# Altium PCB key.PcbDoc
Units mm, origin at the board's own origin, x right, y up, seen from the top; angles counter-clockwise.
Board outline 15.13 x 40.13 mm, 2 copper layers (Top Layer, Bottom Layer); 14 components, 10 nets, 38 pads, 15 vias.
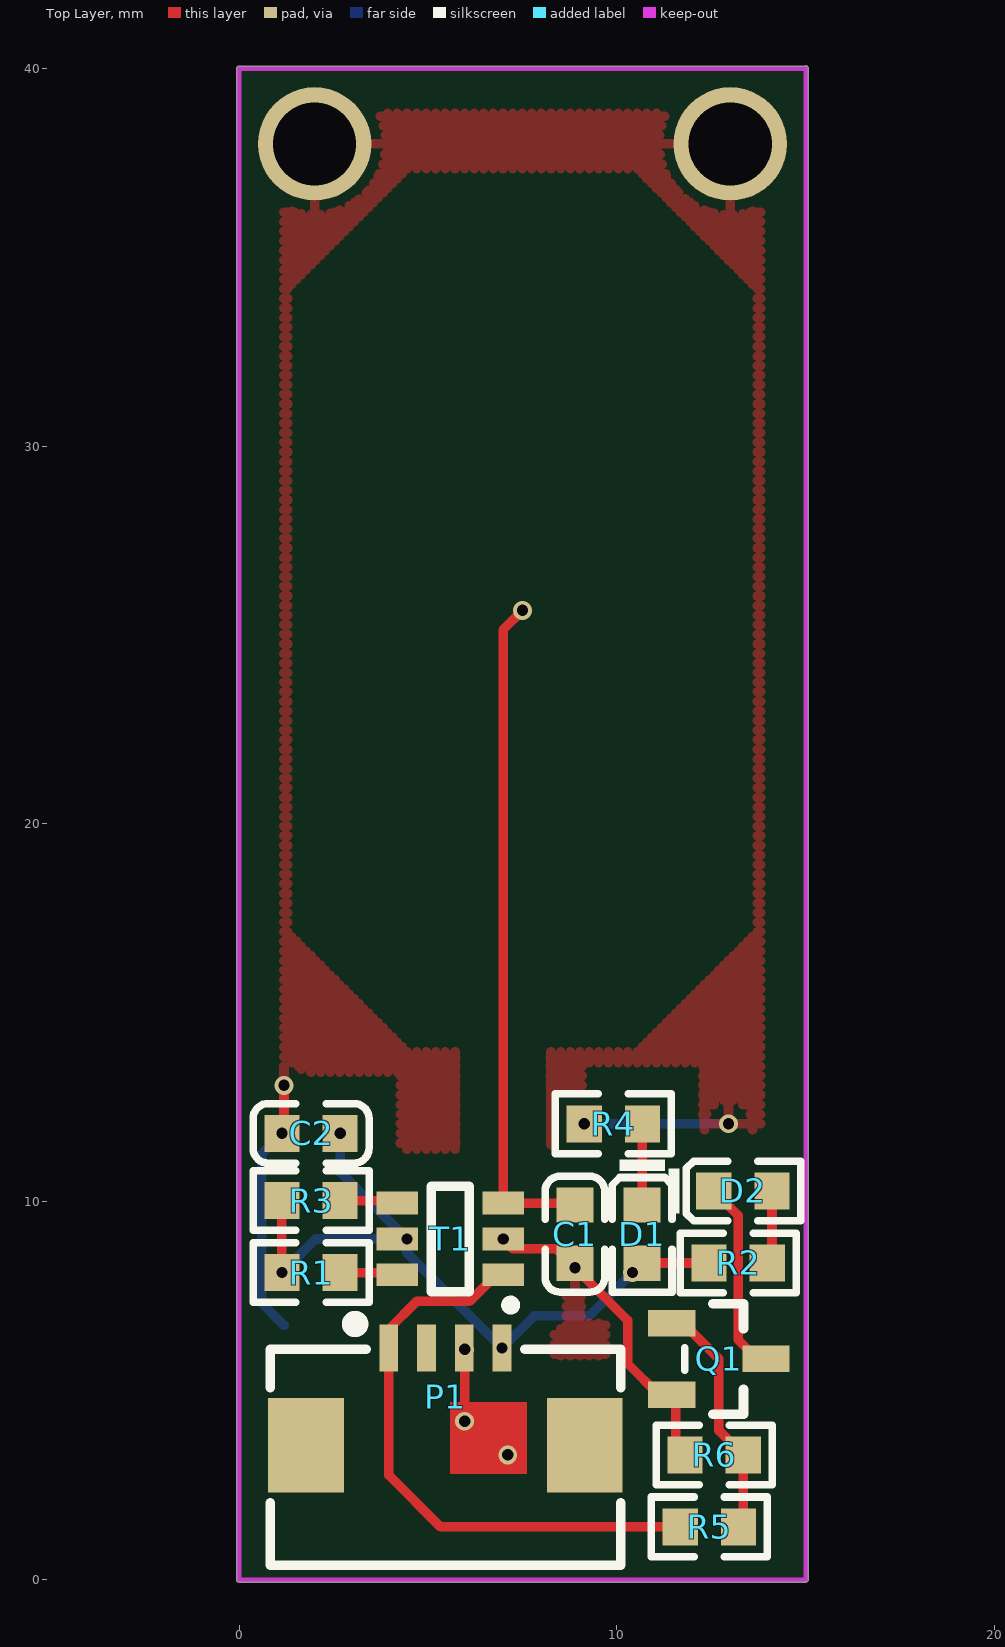
[diagram p0: Top Layer view]
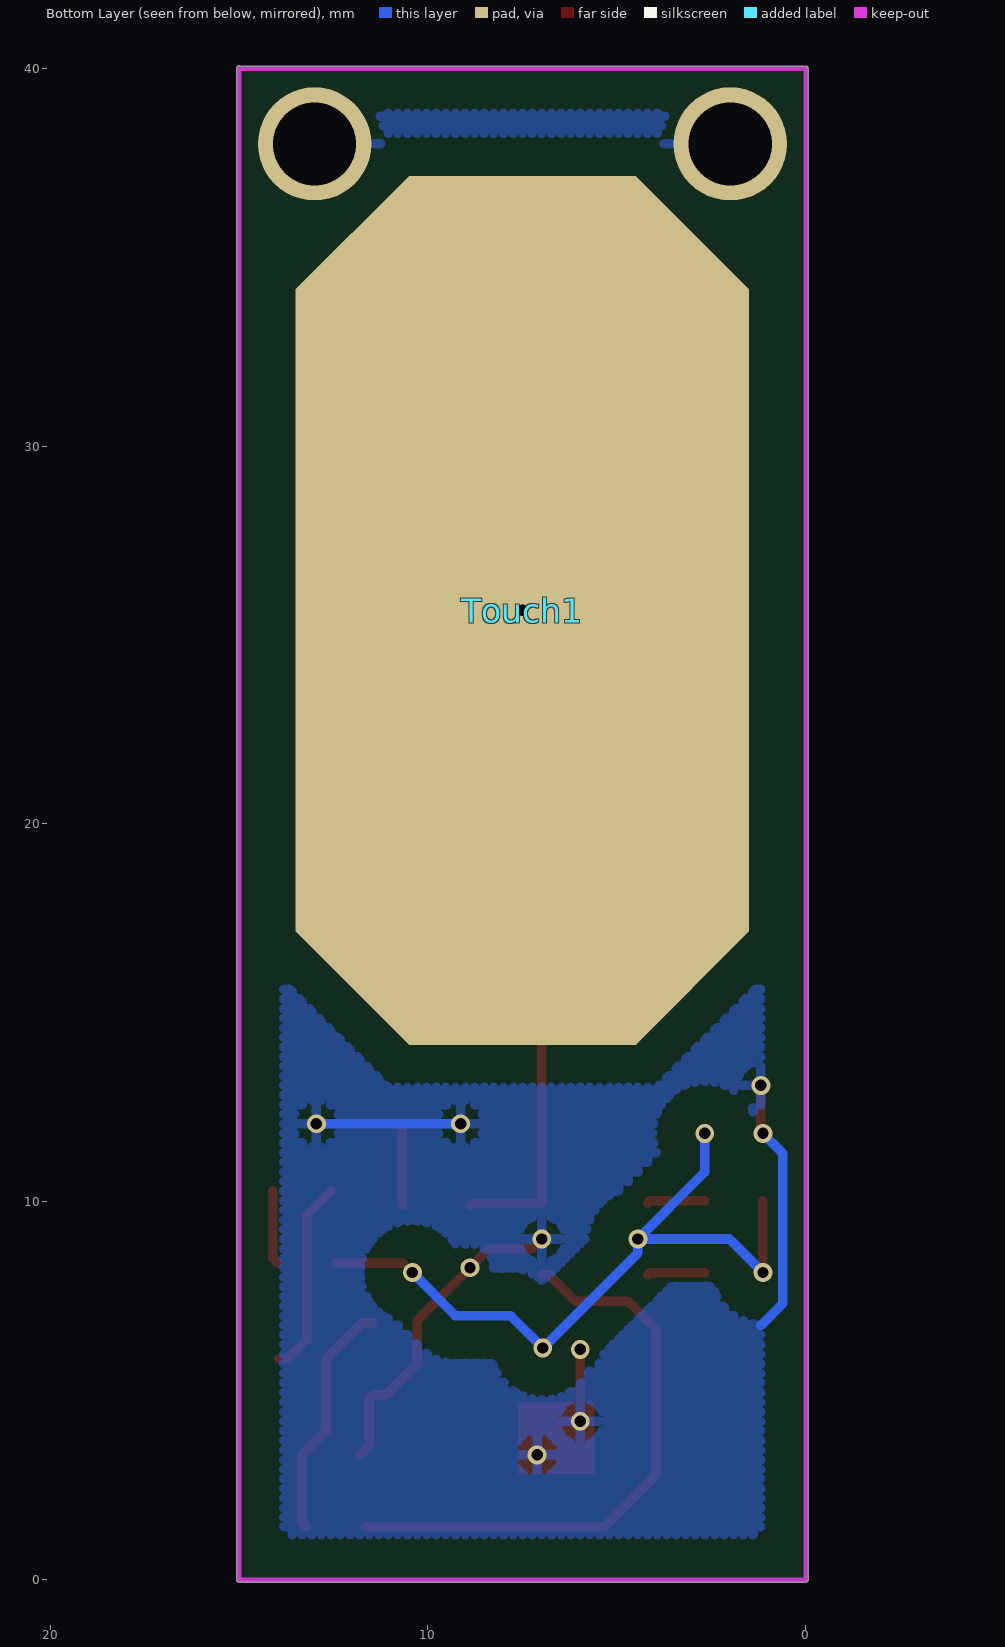
[diagram p1: Bottom Layer view, seen from below]
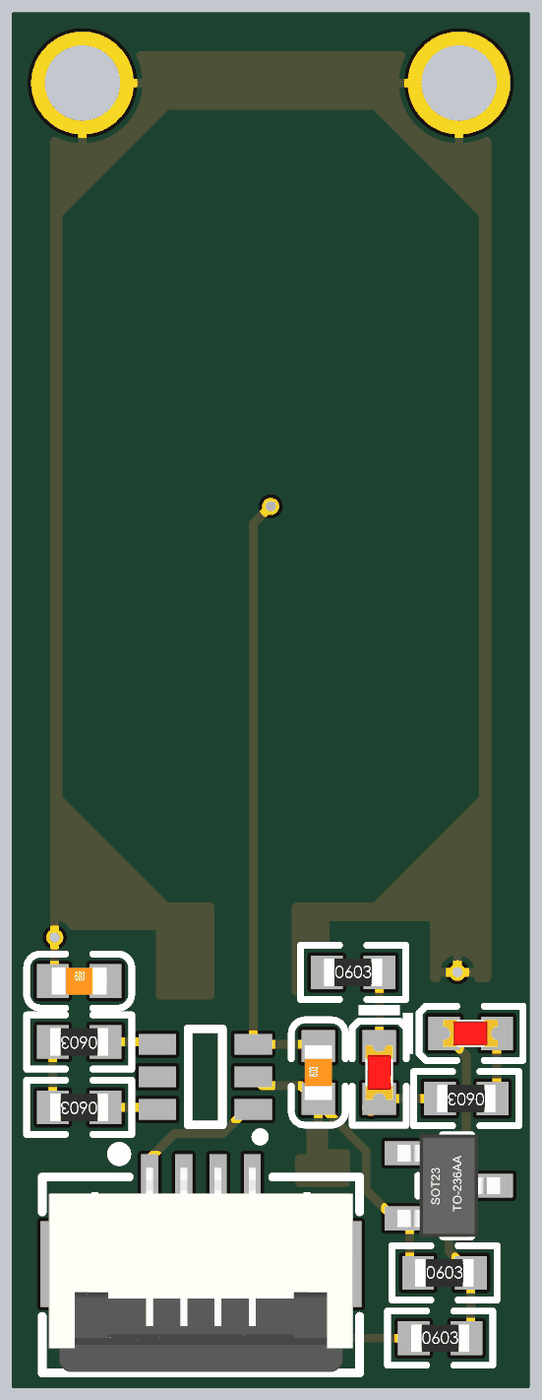
[diagram p2: 3D render of the assembled board from above, using the file's embedded part models]

## Layer stack, top to bottom
Top Solder: solder mask 0.0102, Solder Resist, Dk 3.5
Top Layer: signal copper 0.0356
Dielectric 1: dielectric 0.32, FR-4, Dk 4.8
Bottom Layer: signal copper 0.0356
Bottom Solder: solder mask 0.0102, Solder Resist, Dk 3.5

## Board outline
-0.064,0 ccw(c0,0) 0,-0.064 15,-0.064 ccw(c15,0) 15.064,0 15.064,40 ccw(c15,40) 14.976,40.059 0,40.059 ccw(c0,39.996) -0.064,39.996

## Design rules (kind name [scope] priority, off if disabled: settings)
Clearance CU [InPolygon] p1: gap=1
Clearance Clearance_1 [All] p2: gap=0.152
PolygonConnect [All] p1: connectstyle=Relief reliefconductorwidth=0.254 reliefentries=4 polygonreliefangle="90 Angle" airgapwidth=0.254
RoutingVias [All] p1: holewidth=0.3 width=0.5 viastyle="Through Hole" minholewidth=0.3 minwidth=0.5 maxholewidth=0.5 maxwidth=1.27
SolderMaskExpansion [All] p1: expansion=0.102
Width [All] p1: maxlimit=0.254 minlimit=0.254 preferedwidth=0.254
30 further rules are at their usual default settings.

## Components (designator, comment, footprint, x,y, rotation, side; value= is the part's Value field where it differs from the comment)
C1 "10pF (100) 5% 50V" 0603_C 8.89,9.144 r90 top
C2 "100nF (104) 10% 50V" 0603_C 1.905,11.811 r0 top
D1 "绿灯 0603" 0603_LED_S1 10.668,9.144 r270 top
D2 "黄灯 0603" 0603_LED_S1 13.335,10.287 r0 top
P1 "Header 4" FPC1.0-2H-WS-4P 5.461,3.556 r0 top
Q1 "SS8050 Y1" SOT-23(SOT-23-3) 12.7,5.842 r180 top
R1 "NC" 0603_R 1.905,8.128 r180 top
R2 "470Ω (4700) ±1%" 0603_R 13.208,8.382 r180 top
R3 "NC" 0603_R 1.905,10.033 r180 top
R4 "470Ω (4700) ±1%" 0603_R 9.906,12.065 r0 top
R5 "1KΩ (1001) ±1%" 0603_R 12.446,1.397 r0 top
R6 "10KΩ (1002) ±1%" 0603_R 12.573,3.302 r0 top
T1 "TTP223" SOT-23-6 5.588,9.017 r0 top
Touch1 "TP" TP 7.5,25.654 r90 bottom

## Footprints (in the part's own frame and the unit in brackets; to place one, negate y for a bottom-side part, rotate by r counter-clockwise, add the part's x,y. Pads: shape width x height; smd on the part's side, far side on the other; paste and mask are expansions set on the pad)
0603_C [mm]
  rect 0.93x0.98 smd: 1(-0.77,0) 2(0.77,0)
  silkscreen extent -1.53,-0.79 1.54,0.79, body extent -0.8,-0.4 0.8,0.4, height 0.3
0603_LED_S1 [mm]
  rect 0.93x0.98 smd: A(0.77,0) K(-0.77,0)
  silkscreen extent -1.98,-0.79 1.54,0.79, body extent -0.8,-0.4 0.8,0.4, height 0.6
0603_R [mm]
  rect 0.93x0.98 smd: 1(-0.77,0) 2(0.77,0)
  silkscreen extent -1.53,-0.79 1.54,0.79, body extent -0.85,-0.4 0.85,0.4, height 0.56
FPC1.0-2H-WS-4P [mm] "翻盖FPC，脚距1mm，不含脚（长8.9mm，宽5.2mm，高1.96mm）"
  rect 2x2.5 smd: 0(-3.69,0) 0(3.69,0)
  rect 0.5x1.25 smd: 1(-1.5,2.575) 2(-0.5,2.575) 3(0.5,2.575) 4(1.5,2.575)
  silkscreen extent -4.64,-3.17 4.64,3.31, body extent -4.45,-3.15 4.45,2.85, height 2
SOT-23(SOT-23-3) [mm]
  rect 1.25x0.7 smd: 1(1.25,-0.95) 2(1.25,0.95) 3(-1.25,0)
  silkscreen extent -0.65,-1.46 0.9,1.46, body extent -1.5,-1.5 1.5,1.5, height 1.3
SOT-23-6 [mm]
  rect 1.1x0.6 smd: 1(1.4,-0.95) 2(1.4,0) 3(1.4,0.95) 4(-1.4,0.95) 5(-1.4,0) 6(-1.4,-0.95)
  silkscreen extent -0.5,-1.87 1.73,1.4
TP [mm]
  oct 23x12 smd mask+0.3: 1(0,0)

## Part data
C1: library part "0603 10pF (100) 5% 50V", "贴片电容"
C2: library part "0603 100nF (104) 10% 50V", "贴片电容"
D1: library part "0603 绿灯", "发光二极管"
D2: library part "0603 黄灯", "发光二极管"
P1: "Header, 4-Pin"
Q1: library part "SOT-23 SS8050 Y1", "三极管"
R1 R3 R6: library part "0603 10KΩ (1002) 1%", "贴片电阻"
R2 R4: library part "0603 470Ω (4700) 1%", "贴片电阻"
R5: library part "0603 1KΩ (1001) 1%", "贴片电阻"

## Free pads (board coordinates)
  round 3 hole 2.2: 2(13,38) 3(2,38)

## Via types
v1: diameter 0.5, hole 0.3, Top Layer to Bottom Layer, 15 vias

## Nets (pads, with @x,y where several pads share a name; then routed paths per layer and width w, separated by ;. In a path a pad name is that pad's centre, name@x,y a point inside that pad or via, vN(x,y) a via of type N, cw(c..) or ccw(c..) an arc to the next point about the centre after c; other vN are vias at no path point)
GND: C1.1 C2.1 P1.3 pad.2 pad.3 Q1.2 R4.1 R6.1 T1.2 | length 21.3
  Top Layer w0.254: v1(1.135,11.811) 1.191,11.867 v1(1.191,13.081) ; P1.3 5.961,6.104 v1(5.969,6.096) v1(5.969,4.191) ; v1(6.988,9.017) 7.242,8.763 8.382,8.763 v1(8.89,8.255) 10.287,6.858 10.287,5.715 11.11,4.892 Q1.2 11.557,4.785 11.557,3.548 R6.1
  Bottom Layer w0.254: 1.191,6.731 0.606,7.316 0.606,11.274 v1@1.206,11.874 ; v1(9.136,12.065) v1(12.954,12.065)
  other v1: 7.112,3.302
NetC1_2: C1.2 T1.3 Touch1.1 | length 17.8
  Top Layer w0.254: v1(7.5,25.654) 6.988,25.142 T1.3 8.837,9.967 C1.2
NetD1_K: D1.K R4.2 | length 2.2
  Top Layer w0.254: D1.K 10.676,9.922 R4.2
NetD2_A: D2.A R2.1 | length 2
  Top Layer w0.254: R2.1 14.105,8.509 D2.A
NetD2_K: D2.K Q1.3 | length 5.2
  Top Layer w0.254: D2.K 13.208,9.644 13.208,6.35 13.716,5.842 Q1.3
NetQ1_1: Q1.1 R5.2 R6.2 | length 6.4
  Top Layer w0.254: Q1.1 11.75,6.792 12.7,5.842 12.7,3.945 R6.2 13.343,1.524 R5.2
NetR1_1: R1.1 T1.6 | length 1.5
  Top Layer w0.254: R1.1 4.127,8.128 T1.6
NetR3_1: R3.1 T1.4 | length 1.5
  Top Layer w0.254: R3.1 4.122,10.033 T1.4
OUT: P1.1 R5.1 T1.1 | length 15.8
  Top Layer w0.254: T1.1 6.797,8.067 6.096,7.366 4.699,7.366 3.961,6.628 P1.1 3.961,2.77 5.334,1.397 R5.1
VCC: C2.2 D1.A P1.4 R1.2 R2.2 R3.2 T1.5 | length 19.1
  Top Layer w0.254: v1(1.135,8.128) R3.2 ; D1.A 10.676,8.382 R2.2
  Bottom Layer w0.254: v1(1.135,8.128) 2.024,9.017 v1(4.445,9.017) ; v1(2.675,11.811) 2.675,10.787 v1(4.445,9.017) ; v1(10.414,8.128) 9.271,6.985 7.815,6.985 v1(6.961,6.131) 4.445,8.647 v1(4.445,9.017)
pads on no net: P1.0 P1.2

## Polygon pours and split planes (outlines as drawn)
GND on Top Layer "GND_L01_P000" (hatched 90Degree grid 0 track 0.254, remove dead copper, pour order 0): 15,0 15,39.991 14.995,39.996 0,39.996 0,0
GND on Bottom Layer "GND_L02_P002" (hatched 90Degree grid 0 track 0.254, remove dead copper, pour order 2): 15,0 15,40 0.004,40 0,39.996 0,0

## Keep-outs
Keep-Out Layer:
  lines w0.127: 0,37.719 0,39.996 14.995,39.996 ; 0,37.973 0,0 15,0 15,40

## Other copper
Top Layer:
  rectangle: 5.588,2.794 7.62,4.699
  pour cut-out: 4.445,37.338 1.294,34.187 1.294,17.121 4.445,13.97 10.541,13.97 13.716,17.145 13.716,34.163 10.541,37.338